# Altium PCB GR_Alim2026.PcbDoc
Units mm, origin at the board's own origin, x right, y up, seen from the top; angles counter-clockwise.
Board outline 82.04 x 84.45 mm, 2 copper layers (Top Layer, Bottom Layer); 62 components, 31 nets, 144 pads, 1 vias.
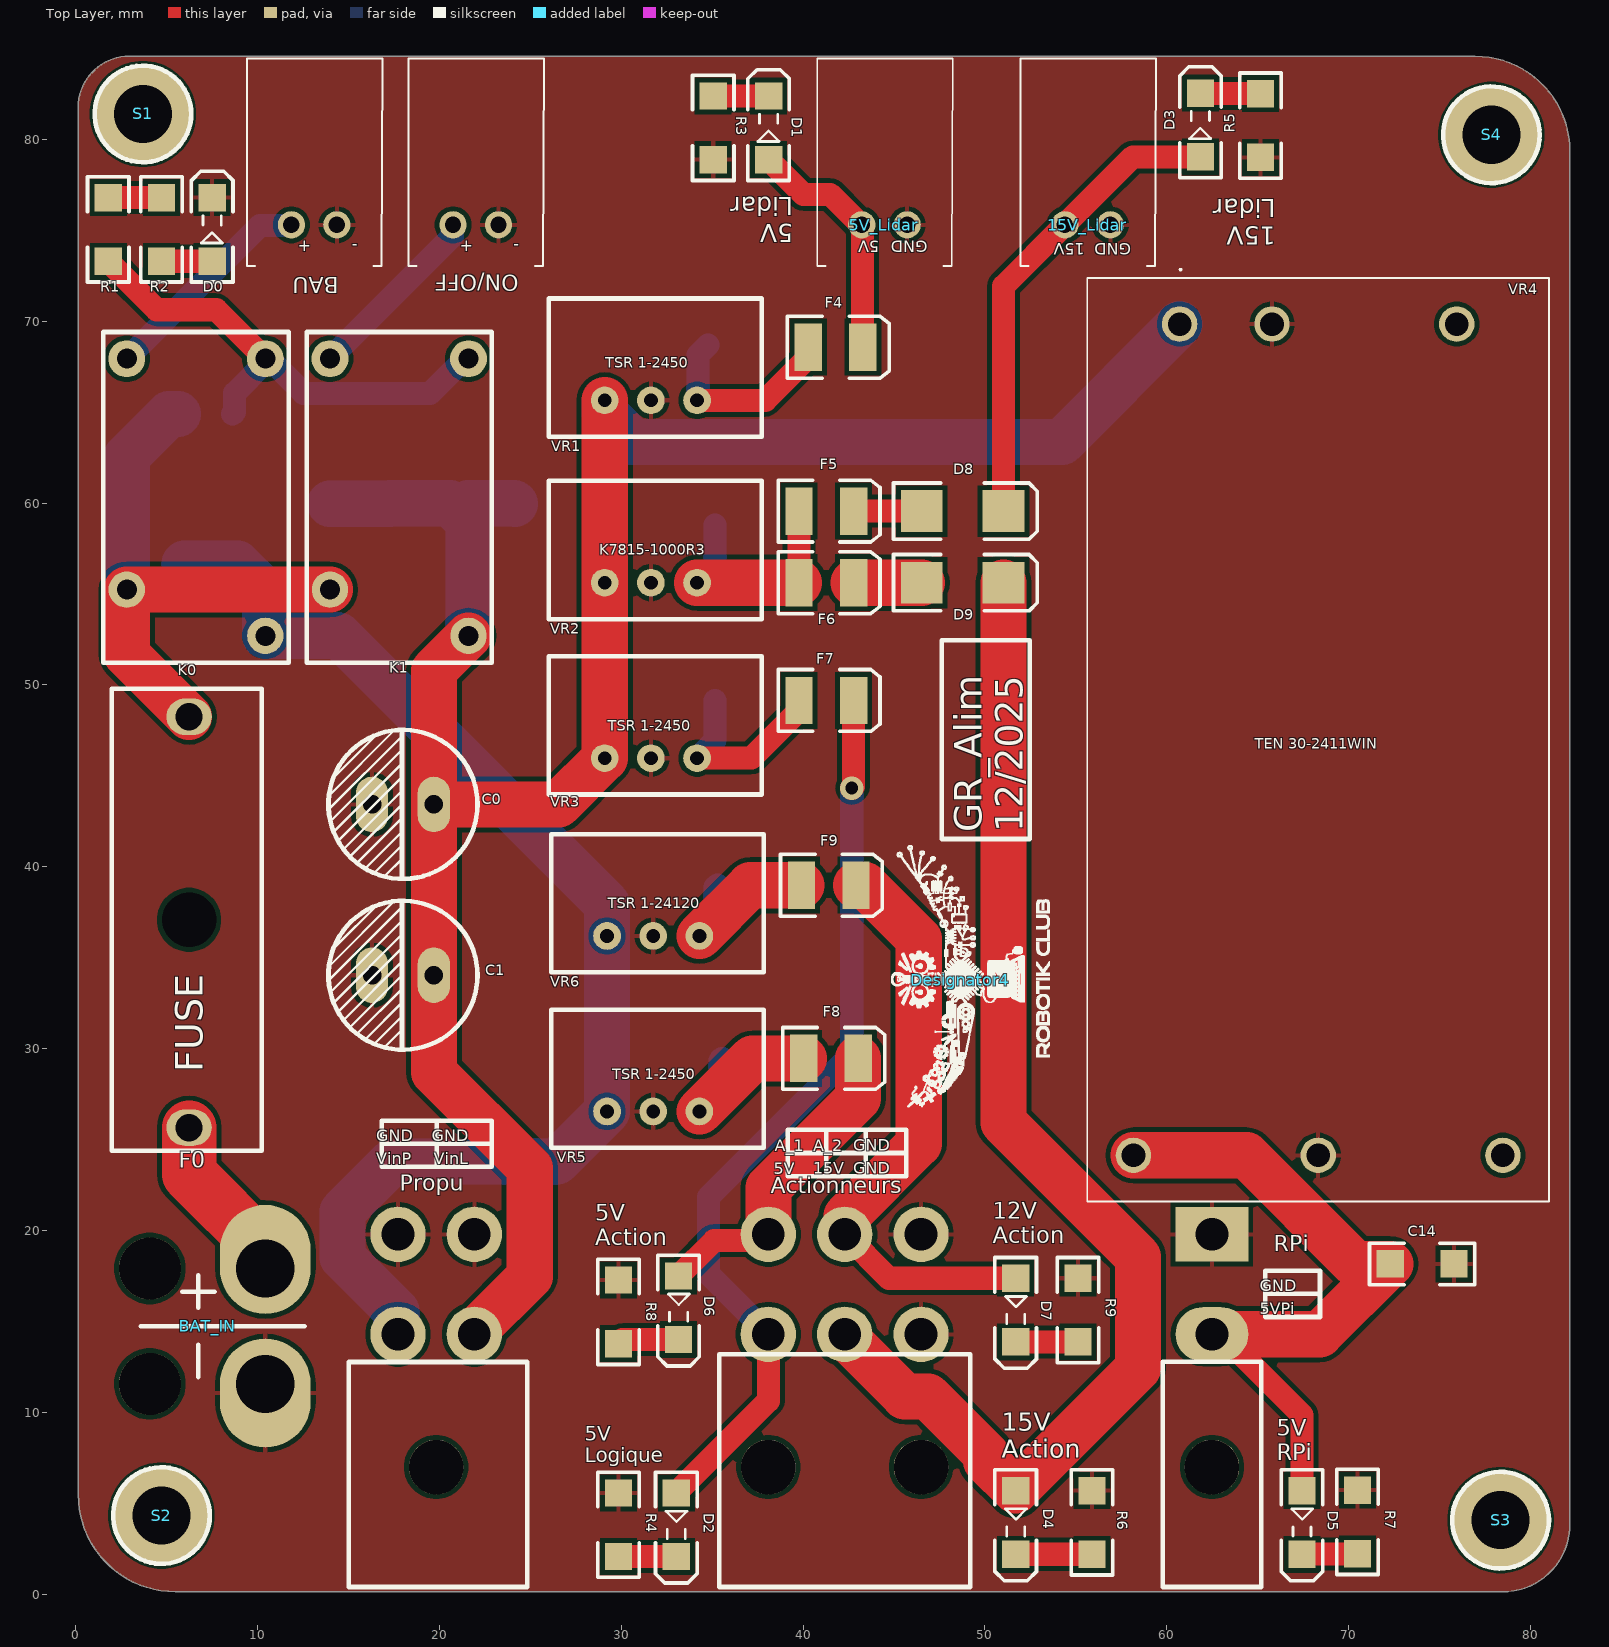
[diagram p0: Top Layer view]
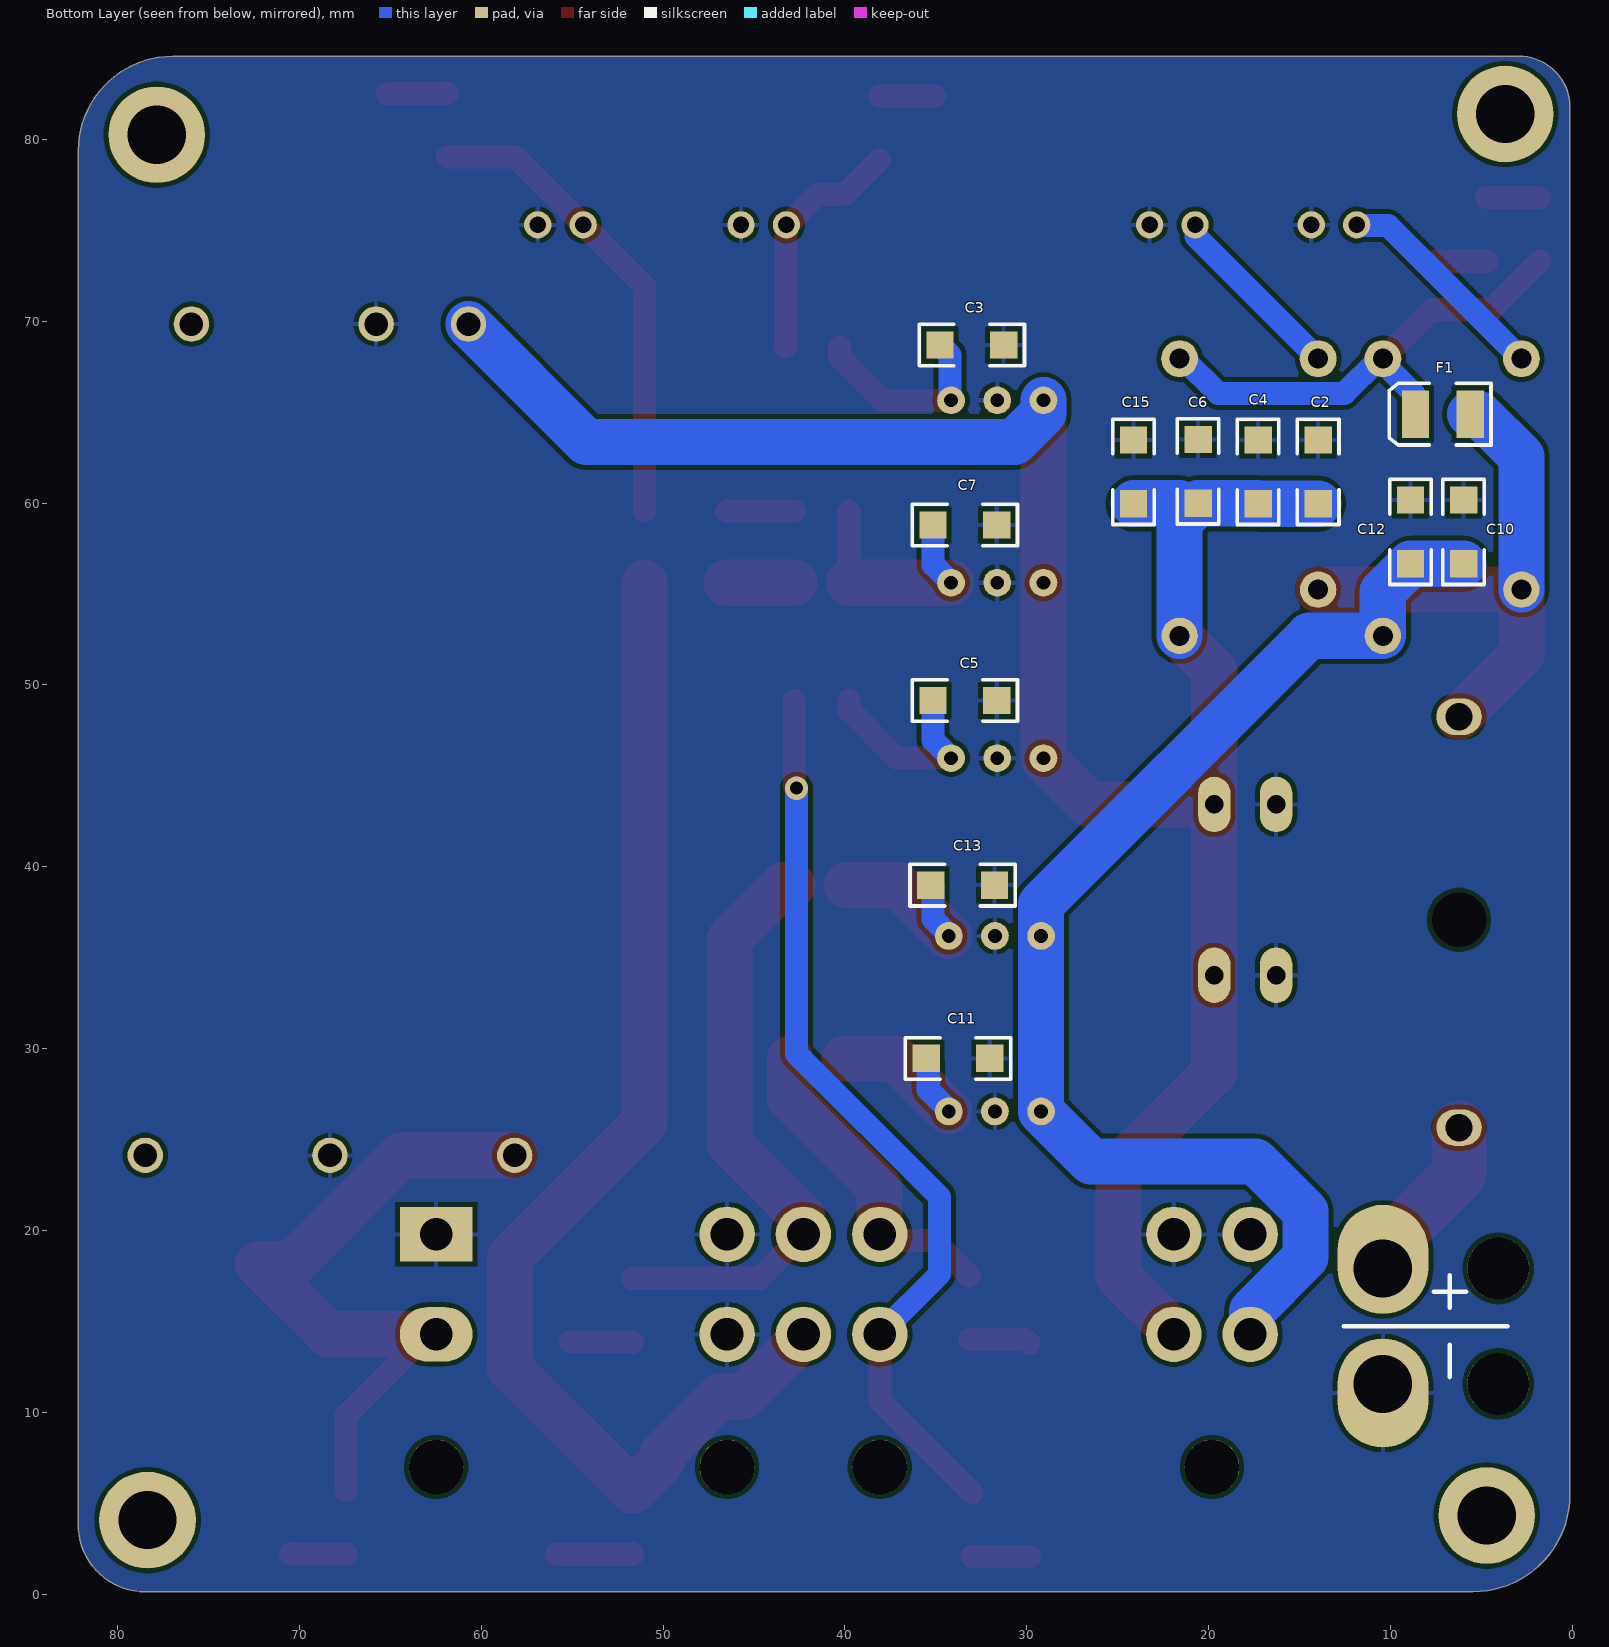
[diagram p1: Bottom Layer view, seen from below]

## Layer stack, top to bottom
Top Solder: solder mask 0.0102, Solder Resist, Dk 3.5
Top Layer: signal copper 0.0356
Dielectric 1: dielectric 0.32, FR-4, Dk 4.8
Bottom Layer: signal copper 0.0356
Bottom Solder: solder mask 0.0102, Solder Resist, Dk 3.5

## Board outline
0.128,5.461 0.128,81.788 cw(c2.922,81.788) 2.922,84.582 76.963,84.582 cw(c76.963,79.375) 82.17,79.375 82.17,3.81 cw(c78.487,3.81) 78.487,0.127 5.462,0.127 cw(c5.462,5.461)

## Design rules (kind name [scope] priority, off if disabled: settings)
Clearance [All] p1: gap=0.254 ignorepadtopadclearanceinfootprint=FALSE
PolygonConnect [All] p1: connectstyle=Relief reliefconductorwidth=0.254 reliefentries=4 polygonreliefangle="90 Angle" airgapwidth=0.254
RoutingVias [All] p1: holewidth=0.711 width=1.27 viastyle="Through Hole" minholewidth=0.711 minwidth=1.27 maxholewidth=0.711 maxwidth=1.27
SolderMaskExpansion [All] p1: expansion=0.102 istentingtop=FALSE
SupplyNets "Schematic Supply Nets_11" [InNet('15V_S')] p1: voltage=0.000
SupplyNets "Schematic Supply Nets_10" [InNet('15V_Lid')] p2: voltage=0.000
SupplyNets "Schematic Supply Nets_9" [InNet('Vin_P')] p3: voltage=0.000
SupplyNets "Schematic Supply Nets_8" [InNet('V_Rel')] p4: voltage=0.000
SupplyNets "Schematic Supply Nets_7" [InNet('Vin_L')] p5: voltage=0.000
SupplyNets "Schematic Supply Nets_6" [InNet('5V_Pi')] p6: voltage=0.000
SupplyNets "Schematic Supply Nets_5" [InNet('A2_12V')] p7: voltage=0.000
SupplyNets "Schematic Supply Nets_4" [InNet('V_Bat')] p8: voltage=0.000
SupplyNets "Schematic Supply Nets_3" [InNet('5V_L')] p9: voltage=0.000
SupplyNets "Schematic Supply Nets_2" [InNet('A1_5V')] p10: voltage=0.000
SupplyNets "Schematic Supply Nets_1" [InNet('GND')] p11: voltage=0.000
SupplyNets "Schematic Supply Nets" [InNet('5V_Lid')] p12: voltage=0.000
Width [InNetClass('Power')] p1: maxlimit=2.54 minlimit=0.254 preferedwidth=1.5
30 further rules are at their usual default settings.

## Components (designator, comment, footprint, x,y, rotation, side; value= is the part's Value field where it differs from the comment)
5V_Lidar "Header 2H" S2B-XH-A 43.221,75.311 r0 top
15V_Lidar "Header 2H" S2B-XH-A 54.397,75.311 r0 top
Actionneurs "MinifitJr 3x2H" MOLEX_MINIFITJR_3X2 42.283,14.285 r0 top
BAT_IN "Battery Onboard Solder" "Battery SALE" 10.415,11.557 r90 top
BAU "S2B-XH-A" S2B-XH-A 11.852,75.311 r0 top
C0 "Cap2" Condensateur 19.686,43.434 r180 top value=100µF
C1 "Cap2" Condensateur 19.686,34.036 r180 top value=100µF
C2 "Cap" "Capacitor 1206" 13.971,61.722 r270 bottom value=10µF
C3 "(optional)" "Capacitor 1206" 33.021,68.707 r0 bottom value=10µF
C4 "Cap" "Capacitor 1206" 17.273,61.722 r270 bottom value=10µF
C5 "(optional)" "Capacitor 1206" 33.402,49.149 r0 bottom value=22µF
C6 "Cap" "Capacitor 1206" 20.575,61.75 r270 bottom value=10µF
C7 "(optional)" "Capacitor 1206" 33.402,58.801 r0 bottom value=10µF
C10 "Cap" "Capacitor 1206" 5.97,58.42 r270 bottom value=10µF
C11 "(optional)" "Capacitor 1206" 33.783,29.464 r0 bottom value=10µF
C12 "Cap" "Capacitor 1206" 8.891,58.42 r270 bottom value=10µF
C13 "(optional)" "Capacitor 1206" 33.529,38.989 r0 bottom value=22µF
C14 "Cap" "Capacitor 1206" 74.042,18.161 r0 top value="220 uF"
C15 "Cap" "Capacitor 1206" 24.131,61.722 r90 bottom value=47µF
D0 "V_Rel" KP-3216SEC 7.494,75.057 r90 top
D1 "5V_L" KP-3216SEC 38.101,80.645 r90 top
D2 "5V_Lid" KP-3216SEC 33.021,3.81 r270 top
D3 "A_2" KP-3216SEC 61.85,80.8 r90 top
D4 "5V_L" KP-3216SEC 51.69,3.937 r270 top
D5 "5V_L" KP-3216SEC 67.438,3.937 r270 top
D6 "A_1" KP-3216SEC 33.148,15.748 r270 top
D7 "A_2_12V" KP-3216SEC 51.69,15.621 r270 top
D8 "LGE SS12" SMB 48.769,59.563 r0 top
D9 "LGE SS12" SMB 48.769,55.626 r0 top
Designator4 "Comment" Logo_lowres 48.642,33.782 r90 top
F0 "15A max" Fuse 6.224,25.654 r90 top
F1 "100mA" 3.5X2.8X1.9 7.113,64.897 r0 bottom
F4 "500 mA" 3.5X2.8X1.9 41.784,68.58 r0 top
F5 "500mA" 3.5X2.8X1.9 41.276,59.563 r0 top
F6 "100mA" 3.5X2.8X1.9 41.276,55.626 r0 top
F7 "1 A" 3.5X2.8X1.9 41.276,49.149 r0 top
F8 "Fuse 2" 3.5X2.8X1.9 41.53,29.464 r0 top
F9 "Fuse 2" 3.5X2.8X1.9 41.403,38.989 r0 top
K0 "Relay-SPST" Relay 6.605,60.325 r0 top
K1 "Relay-SPST" Relay 17.781,60.325 r0 top
ON/OFF "S2B-XH-A" S2B-XH-A 20.742,75.311 r0 top
Propu "MinifitJr 2X2H" MOLEX_MINIFITJR_2X2H 21.913,14.285 r0 top
R1 "Res2" "Resistor 1206" 1.779,75.057 r90 top value=1K3
R2 "Res2" "Resistor 1206" 4.7,75.057 r270 top value=1K3
R3 "Res2" "Resistor 1206" 35.053,80.645 r90 top value=300
R4 "Res2" "Resistor 1206" 29.846,3.81 r270 top value=300
R5 "Res2" "Resistor 1206" 65.152,80.772 r270 top value=1K3
R6 "Res2" "Resistor 1206" 55.881,3.937 r90 top value=1K3
R7 "Res2" "Resistor 1206" 70.486,3.965 r90 top value=300
R8 "300" "Resistor 1206" 29.846,15.522 r90 top
R9 "1K3" "Resistor 1206" 55.119,15.621 r90 top
RPi "Header 2H" Molex_MiniFitJr_2x1H 62.485,14.285 r270 top
S1 "Screw M3" "Screw M3" 3.684,81.407 r0 top
S2 "Screw M3" "Screw M3" 4.7,4.318 r0 top
S3 "Screw M3" "Screw M3" 78.36,4.064 r0 top
S4 "Screw M3" "Screw M3" 77.852,80.264 r0 top
VR1 "TSR 1-2450" TRS 29.084,65.659 r180 top
VR2 "K7815-1000R3" TRS 29.084,55.626 r180 top
VR3 "TSR 1-2450" TRS 29.084,45.974 r180 top
VR4 "TEN 30-2411WIN" TEN302411WIN 60.707,69.85 r180 top
VR5 "TSR 1-2450" TRS 29.211,26.543 r180 top
VR6 "TSR 1-24120" TRS 29.211,36.195 r180 top

## Footprints (in the part's own frame and the unit in brackets; to place one, negate y for a bottom-side part, rotate by r counter-clockwise, add the part's x,y. Pads: shape width x height; smd on the part's side, far side on the other; paste and mask are expansions set on the pad)
3.5X2.8X1.9 [mm] "SM LED; 2 C-Bend Leads; Body 3.5 x 2.8 x 1.9 mm, inc leads (LxWxH typ)"
  rect 1.5x2.6 smd: 1(-1.5,0) 2(1.5,0)
  silkscreen extent -2.65,-1.7 2.95,1.7
"Battery SALE" [mm] "Connecteur Batterie"
  round 3.4 hole 3.4: 0(0,6.35) 0(6.35,6.35)
  oval 6x5 hole 3.2 copper offset -0.5,0: 1(0,0)
  oval 6x5 hole 3.2 copper offset 0.5,0: 2(6.35,0)
  silkscreen extent 0.38,-2.16 5.97,6.86
"Capacitor 1206" [mm]
  rect 1.5x1.5 smd: 1(-1.75,0) 2(1.75,0)
  silkscreen extent -2.89,-1.14 2.89,1.14, body extent -1.97,-0.99 1.97,0.96, height 1.3
Condensateur [mil]
  oval 70x120 hole 40: 1(0,0) 2(133.86,0)
  silkscreen extent -94,-161 228,161, body extent -93,-160 227,160, height 500
Fuse [mm] "Porte-fusible monté sur circuit 10 (UL) A, 6.3 (VDE) A, fusible Cartouche, 893-0574"
  round 2 hole 3: 0(11.43,0)
  oval 2x2.5 hole 1.5: 1(0,0) 2(22.6,0)
  silkscreen extent -1.27,-4 24.13,4.25, body extent -1.27,-4.29 24.13,4.29, height 11.41
KP-3216SEC [mm]
  rect 1.5x1.5 smd: 1(-1.75,0) 2(1.75,0)
  silkscreen extent -2.89,-1.14 3.2,1.14, body extent -1.7,-0.79 1.5,0.81, height 1.1
Logo_lowres [mm]
  silkscreen extent -7.01,-4.93 7.39,3.76
Molex_MiniFitJr_2x1H [mm] "Connecteur Molex 2"
  rect 3x4 hole 1.8: 1(-5.5,0)
  oval 3x4 hole 1.8: 2(0,0)
  round 3 hole 3 unplated: 3(7.3,0)
  silkscreen extent 1.5,-2.7 13.9,2.7, body extent -6.03,-2.7 13.9,3.1, height 11.01
MOLEX_MINIFITJR_2X2H [mm] "MOLEX_MINIFITJR_3X2, 39-30-1060"
  round 3.048 hole 1.8: 1(-4.2,5.5) 2(-4.2,0) 3(0,5.5) 4(0,0)
  round 3 hole 3 unplated: 10(-2.1,-7.3)
  silkscreen extent -6.9,-13.9 2.9,-1.52, body extent -6.88,-13.9 3.12,6.03, height 11.4
MOLEX_MINIFITJR_3X2 [mm] "MOLEX_MINIFITJR_3X2, 39-30-1060"
  round 3.048 hole 1.8: 1(-4.2,5.5) 2(-4.2,0) 3(0,5.5) 4(0,0) 5(4.2,5.5) 6(4.2,0)
  round 3 hole 3 unplated: 10(-4.2,-7.3) 11(4.2,-7.3)
  silkscreen extent -6.9,-13.9 6.9,-1.1, body extent -6.9,-13.9 7.3,6.04, height 11.41
Relay [mm] "SPST-NO Relay"
  round 2 hole 1.1: 1(3.81,-7.62) 2(-3.81,-5.08)
  round 2.032 hole 1.1: 3(-3.81,7.62) 4(3.81,7.62)
  silkscreen extent -5.09,-9.09 5.09,9.09, body extent -5.08,-9.14 5.08,9.14, height 15
"Resistor 1206" [mm]
  rect 1.5x1.5 smd: 1(-1.75,0) 2(1.75,0)
  silkscreen extent -2.89,-1.14 2.89,1.14, body extent -1.98,-0.95 1.98,0.93, height 0.55
S2B-XH-A [mm]
  round 1.5 hole 0.9: 1(0,0) 2(2.5,0)
  silkscreen extent -2.45,-2.26 5,9.14, body extent -2.41,-2.32 4.99,9.18, height 6.15
"Screw M3" [mm] "M3 iso Screw"
  round 5.32 hole 3.2 unplated: 0(0,0)
  silkscreen extent -2.66,-2.66 2.66,2.66
SMB [mm] "DO-214-AA/SMB; 2 C-Bend Leads; Body 5.3 x 3.6 mm, inc. leads (LxW)"
  rect 2.3x2.3 smd: 1(-2.25,0) 2(2.25,0)
  silkscreen extent -3.8,-1.55 4.1,1.55
TEN302411WIN [mm]
  round 1.95 hole 1.3: 1(0,0) 2(-5.08,0) 3(-15.24,0) 4(2.54,45.72) 5(-7.62,45.72) 6(-17.78,45.72)
  silkscreen extent -20.32,-3.05 5.08,48.26, body extent -20.32,-2.79 5.08,48.01, height 11.03
TRS [mil]
  round 60 hole 30: 1(0,0) 2(-100,0) 3(-200,0)
  silkscreen extent -340,-220 121,79, body extent -341,-218 120,80, height 398

## Part data
5V_Lidar 15V_Lidar RPi: "Header, 2-Pin, Right Angle", LatestRevisionDate=17-Jul-2002, LatestRevisionNote="Re-released for DXP Platform.", Publisher="Altium Limited"
Actionneurs: library part "Header 3X2H", "Header, 3-Pin, Dual row, Right Angle", LatestRevisionDate=17-Jul-2002, LatestRevisionNote="Re-released for DXP Platform.", Publisher="Altium Limited"
BAT_IN: library part "Header 2", "Header, 2-Pin / Battery Onboard Solder / 24V", LatestRevisionDate=17-Jul-2002, LatestRevisionNote="Re-released for DXP Platform.", Publisher="Altium Limited"
BAU ON/OFF: library part S2B-XH-A-1_LF__SN_, "Connector", Arrow Part Number=S2B-XH-A-1(LF)(SN), Manufacturer_Name="JST (JAPAN SOLDERLESS TERMINALS)", Datasheet Link=http://www.jst-mfg.com/product/pdf/eng/eXH.pdf, Height=6.1mm, Manufacturer_Part_Number=S2B-XH-A-1(LF)(SN)
C0 C1 C2 C4 C6 C10 C12 C14 C15: "Capacitor", Publisher="Altium Limited"
  C0 C1: PackageDescription="Capacitor; 2 Leads", PackageReference=CAPR5-4X5, Published=23-Sep-2002
  C2 C4 C6 C10 C12 C14 C15: LatestRevisionDate=17-Jul-2002, LatestRevisionNote="Re-released for DXP Platform.", PackageDescription="Radial Cap, Thru-Hole; 2 Leads; 0.3 in Pin Spacing", PackageReference=RAD-0.3, Published=8-Jun-2000
C3 C5 C7 C11 C13: library part Cap, "Capacitor", LatestRevisionDate=17-Jul-2002, LatestRevisionNote="Re-released for DXP Platform.", PackageDescription="Radial Cap, Thru-Hole; 2 Leads; 0.3 in Pin Spacing", PackageReference=RAD-0.3, Published=8-Jun-2000, Publisher="Altium Limited"
D0 D1 D2 D3 D4 D5 D6 D7: library part LED2, "Typical RED, GREEN, YELLOW, AMBER GaAs LED", LatestRevisionDate=17-Jul-2002, LatestRevisionNote="Re-released for DXP Platform.", PackageDescription="SM LED; 2 Flat Leads", PackageReference=3.2X1.6X1.1, PackageVersion=Feb-2002, Published=8-Jun-2000, Publisher="Altium Limited"
D8 D9: library part Diode, "Default Diode", Code_JEDEC=DO-214-AB, LatestRevisionDate=17-Jul-2002, LatestRevisionNote="Re-released for DXP Platform.", PackageDescription="DO-214-AB/SMC; 2 C-Bend Leads; Body 7.9 x 5.9 mm, inc. leads (LxW)", PackageReference=SMC, PackageVersion=Sep-1996, Published=8-Jun-2000, Publisher="Altium Limited"
F0: library part "Fuse 2", "Main Fuse", LatestRevisionDate=17-Jul-2002, LatestRevisionNote="Re-released for DXP Platform.", PackageDescription="Thru-Hole; 2 Leads", PackageReference=PIN-W2/E2.8, Published=8-Jun-2000, Publisher="Altium Limited"
F1: library part "Fuse 2", "Resettable fuse T0", LatestRevisionDate=17-Jul-2002, LatestRevisionNote="Re-released for DXP Platform.", PackageDescription="Thru-Hole; 2 Leads", PackageReference=PIN-W2/E2.8, Published=8-Jun-2000, Publisher="Altium Limited"
F4 F5: library part "Fuse 2", "Resettable Fuse αA / JF", LatestRevisionDate=17-Jul-2002, LatestRevisionNote="Re-released for DXP Platform.", PackageDescription="Thru-Hole; 2 Leads", PackageReference=PIN-W2/E2.8, Published=8-Jun-2000, Publisher="Altium Limited"
F6: library part "Fuse 2", "Resettable Fuse T0", LatestRevisionDate=17-Jul-2002, LatestRevisionNote="Re-released for DXP Platform.", PackageDescription="Thru-Hole; 2 Leads", PackageReference=PIN-W2/E2.8, Published=8-Jun-2000, Publisher="Altium Limited"
F7: library part "Fuse 2", "Resettable fuse JG / BF", LatestRevisionDate=17-Jul-2002, LatestRevisionNote="Re-released for DXP Platform.", PackageDescription="Thru-Hole; 2 Leads", PackageReference=PIN-W2/E2.8, Published=8-Jun-2000, Publisher="Altium Limited"
F8 F9: "Résistance 0Ω", LatestRevisionDate=17-Jul-2002, LatestRevisionNote="Re-released for DXP Platform.", PackageDescription="Thru-Hole; 2 Leads", PackageReference=PIN-W2/E2.8, Published=8-Jun-2000, Publisher="Altium Limited"
K0 K1: "Single-Pole Single-Throw Relay", LatestRevisionDate=17-Jul-2002, LatestRevisionNote="Re-released for DXP Platform.", PackageReference=MODULE4, Published=24-Mar-1999, Publisher="Altium Limited"
Propu: library part "Header 2X2H", "Header, 2-Pin, Dual row, Right Angle", LatestRevisionDate=17-Jul-2002, LatestRevisionNote="Re-released for DXP Platform.", Publisher="Altium Limited"
R1 R2 R3 R4 R5 R6 R7: "Resistor", LatestRevisionDate=17-Jul-2002, LatestRevisionNote="Re-released for DXP Platform.", PackageDescription="Axial Device, Thru-Hole; 2 Leads; 0.4 in Pin Spacing", PackageReference=AXIAL-0.4, Published=8-Jun-2000, Publisher="Altium Limited"
R8 R9: library part Res2, "Resistor", LatestRevisionDate=17-Jul-2002, LatestRevisionNote="Re-released for DXP Platform.", PackageDescription="Axial Device, Thru-Hole; 2 Leads; 0.4 in Pin Spacing", PackageReference=AXIAL-0.4, Published=8-Jun-2000, Publisher="Altium Limited"
VR1 VR2 VR3 VR5 VR6: library part "Volt Reg", "Voltage Regulator", LatestRevisionDate=29-May-2009, LatestRevisionNote="IPC-7351 Footprint Added.", PackageDescription="3-Pin Transistor Outline Package 2.54 mm Pitch, 15.1 mm Lead Span", PackageReference=D2PAK, Published=24-Mar-1999, Publisher="Altium Limited"
VR4: library part TEN_30-2411WIN, "Power Supply", Manufacturer_Name="Traco Power", Mouser Part Number=495-TEN-30-2411WIN, Datasheet Link=https://tracopower.com/ten30win-datasheet/, Height=10.7mm, Manufacturer_Part_Number="TEN 30-2411WIN", Mouser Price/Stock=https://www.mouser.co.uk/ProductDetail/TRACO-Power/TEN-30-2411WIN?qs=ckJk83FOD0WILf%252BNmub5Yg%3D%3D

## Via types
v1: diameter 1.27, hole 0.711, Top Layer to Bottom Layer, 1 vias

## Nets (pads, with @x,y where several pads share a name; then routed paths per layer and width w, separated by ;. In a path a pad name is that pad's centre, name@x,y a point inside that pad or via, vN(x,y) a via of type N, cw(c..) or ccw(c..) an arc to the next point about the centre after c; other vN are vias at no path point)
5V_L: Actionneurs.2 D2.1 F7.2 | length 50.4
  Top Layer w1.27: D2.1 38.083,10.622 Actionneurs.2 ; v1(42.673,44.323) 42.776,44.426 F7.2
  Bottom Layer w1.27: Actionneurs.2 38.083,14.308 34.799,17.592 34.799,21.844 42.673,29.718 v1(42.673,44.323)
5V_Lid: 5V_Lidar.1 D1.1 F4.2 | length 13.4
  Top Layer w1.27: D1.1 40.012,76.984 41.486,76.984 43.159,75.311 5V_Lidar.1 43.252,75.28 43.252,68.612 F4.2
5V_Pi: C14.1 D5.1 RPi.2 VR4.4 | length 39
  Top Layer w1.27: RPi.2 62.985,14.285 67.438,9.832 D5.1
  Top Layer w2.54: VR4.4 64.39,24.13 70.359,18.161 C14.1 68.416,14.285 RPi.2
15V_Lid: 15V_Lidar.1 D3.1 D8.2 | length 26.1
  Top Layer w1.27: D8.2 51.019,71.933 15V_Lidar.1 58.136,79.05 D3.1
15V_S: Actionneurs.4 D4.1 D9.2 | length 69
  Top Layer w2.54: Actionneurs.4 42.283,14.174 45.583,10.874 46.87,10.874 50.06,7.684 50.06,7.317 D4.1 58.421,12.418 58.421,18.542 51.019,25.944 D9.2
A1_5V: Actionneurs.1 D6.1 F8.2 | length 17.6
  Top Layer w1.27: D6.1 35.095,19.445 37.743,19.445 Actionneurs.1@38.101,19.803 ; F8.2@43.019,29.453 F8.2
  Top Layer w2.54: Actionneurs.1@38.101,19.803 38.101,22.352 43.019,27.27 F8.2@43.019,29.453
A2_12V: Actionneurs.3 D7.1 F9.2 | length 33
  Top Layer w1.27: Actionneurs.3 42.304,19.785 44.718,17.371 D7.1
  Top Layer w2.54: Actionneurs.3 42.38,19.882 42.38,20.789 46.356,24.765 46.356,36.026 43.393,38.989 F9.2
GND: 5V_Lidar.2 15V_Lidar.2 Actionneurs.5 Actionneurs.6 BAT_IN.1 BAU.2 C0.2 C1.2 C2.1 C3.1 C4.1 C5.1 C6.1 C7.1 C10.1 C11.1 C12.1 C13.1 C14.2 C15.2 D0.2 ON/OFF.2 Propu.1 Propu.3 R3.1 R4.1 R5.2 R6.2 R7.2 R8.2 R9.2 RPi.1 VR1.2 VR2.2 VR3.2 VR4.2 VR4.5 VR5.2 VR6.2
NetBAT_IN_2: BAT_IN.2 F0.1 | length 9.5
  Top Layer w1: BAT_IN.2 BAT_IN.2@10.415,18.907
  Top Layer w3: F0.1 6.224,23.098 BAT_IN.2@10.415,18.907
NetBAU_1: BAU.1 K0.3 | length 12.1
  Bottom Layer w1.27: K0.3 10.117,75.267 11.808,75.267 BAU.1
NetC3_2: C3.2 F4.1 VR1.3 | length 11
  Top Layer w1.27: VR1.3 37.913,65.659 40.284,68.03 F4.1
  Bottom Layer w1.27: VR1.3 34.212,65.708 34.212,68.149 C3.2
NetC5_2: C5.2 F7.1 VR3.3 | length 10.8
  Top Layer w1.27: VR3.3 37.151,45.974 39.776,48.599 F7.1
  Bottom Layer w1.27: VR3.3 35.152,46.962 C5.2
NetC7_2: C7.2 F5.1 F6.1 VR2.3 | length 13.1
  Top Layer w1.27: F6.1 F5.1
  Top Layer w2.54: VR2.3 F6.1
  Bottom Layer w1.27: VR2.3 35.152,56.614 C7.2
NetC11_2: C11.2 F8.1 VR5.3 | length 10.4
  Top Layer w2.54: VR5.3 37.212,29.464 F8.1
  Bottom Layer w1.27: VR5.3 34.291,26.612 35.418,27.739 35.418,29.349 C11.2
NetC13_2: C13.2 F9.1 VR6.3 | length 10
  Top Layer w2.54: VR6.3 37.085,38.989 F9.1
  Bottom Layer w1.27: VR6.3 34.291,36.264 35.164,37.137 35.164,38.874 C13.2
NetD0_1: D0.1 R2.2 | length 2.8
  Top Layer w1.27: R2.2 D0.1
NetD1_2: D1.2 R3.2 | length 3
  Top Layer w1.27: R3.2 D1.2
NetD2_2: D2.2 R4.2 | length 3.2
  Top Layer w1.27: R4.2 D2.2
NetD3_2: D3.2 R5.1 | length 3.3
  Top Layer w1.27: D3.2 61.864,82.536 65.138,82.536 R5.1
NetD4_2: D4.2 R6.1 | length 4.2
  Top Layer w1.27: D4.2 R6.1
NetD5_2: D5.2 R7.1 | length 3.1
  Top Layer w1.27: D5.2 67.452,2.201 70.472,2.201 R7.1
NetD6_2: D6.2 R8.1 | length 3.4
  Top Layer w1.27: R8.1 30.072,13.998 D6.2
NetD7_2: D7.2 R9.1 | length 3.4
  Top Layer w1.27: D7.2 R9.1
NetD8_1: D8.1 F5.2 | length 3.7
  Top Layer w1.27: F5.2 D8.1
NetD9_1: D9.1 F6.2 | length 3.7
  Top Layer w2.54: F6.2 D9.1
NetK1_3: K1.3 ON/OFF.1 | length 10.2
  Bottom Layer w1.27: K1.3 20.698,74.672 20.698,75.267 ON/OFF.1
NetR1_2: R1.2 R2.1 | length 2.9
  Top Layer w1.27: R1.2 R2.1
V_Bat: F0.2 F1.1 K0.2 K1.2 | length 30.7
  Top Layer w2.54: F0.2 2.795,51.683 K0.2 K1.2
  Bottom Layer w2.54: K0.2 2.795,62.569 5.123,64.897 F1.1
V_Rel: F1.2 K0.4 K1.4 R1.1 | length 27.4
  Top Layer w1.27: R1.1 4.444,70.641 7.718,70.641 K0.4
  Bottom Layer w1.27: F1.2 8.728,65.012 8.728,66.052 10.415,67.739 K0.4 10.621,67.945 12.526,66.04 19.48,66.04 21.385,67.945 K1.4
Vin_L: C0.1 C1.1 C2.2 C4.2 C6.2 C15.1 K1.1 Propu.4 VR1.1 VR2.1 VR3.1 VR4.1 | length 125.3
  Top Layer w2.54: K1.1 19.686,50.8 C0.1 ; Propu.4 21.913,14.422 24.961,17.47 24.961,23.427 19.686,28.702 C1.1 C0.1 ; VR1.1 VR2.1 VR3.1 26.544,43.434 C0.1
  Bottom Layer w2.54: C2.2 C4.2 17.301,60 C6.2 21.591,58.984 K1.1 ; 21.591,60 24.103,60 C15.1 ; VR1.1 29.084,64.966 30.677,63.373 54.23,63.373 VR4.1
Vin_P: C10.2 C12.2 K0.1 Propu.2 VR5.1 VR6.1 | length 68.7
  Bottom Layer w2.54: C10.2 C12.2 10.415,55.146 K0.1 14.462,52.705 29.211,37.956 VR6.1 VR5.1 26.463,23.795 17.413,23.795 14.665,21.048 14.665,18.522 17.616,15.572 17.616,14.382 Propu.2
pads on no net: Actionneurs.10 Actionneurs.11 BAT_IN.0 F0.0 Propu.10 RPi.3 S1.0 S2.0 S3.0 S4.0 VR4.3 VR4.6

## Polygon pours and split planes (outlines as drawn)
GND on Top Layer "GND_L01_P000" (solid, remove dead copper, pour order 0): 0.128,5.461 0.128,81.788 cw(c2.922,81.788) 2.922,84.582 76.963,84.582 cw(c76.963,79.375) 82.17,79.375 82.17,3.81 cw(c78.487,3.81) 78.487,0.127 5.462,0.127 cw(c5.462,5.461)
GND on Bottom Layer "GND_L02_P001" (solid, remove dead copper, pour order 1): 0.128,5.461 0.128,81.788 cw(c2.922,81.788) 2.922,84.582 76.963,84.582 cw(c76.963,79.375) 82.17,79.375 82.17,3.81 cw(c78.487,3.81) 78.487,0.127 5.462,0.127 cw(c5.462,5.461)

## Silkscreen, mask and mechanical layers (free items; w line width, h text height)
Top Overlay:
  lines w0.254: 16.816,24.765 22.861,24.765 ; 19.838,23.495 19.838,26.035 ; 39.142,24.257 45.518,24.257 ; 41.276,22.987 41.276,25.527 ; 43.435,22.987 43.435,25.527 ; 65.406,16.51 68.428,16.51 ; 16.816,23.495 22.861,23.495 22.861,26.035 16.816,26.035 16.816,23.495 ; 39.142,22.987 39.142,25.527 45.67,25.527 45.67,22.987 39.142,22.987 ; 47.626,41.529 52.452,41.529 52.452,52.451 47.626,52.451 47.626,41.529 ; 65.406,15.24 68.428,15.24 68.428,17.78 65.406,17.78 65.406,15.24
  text "5V / Lidar" at 39.441,76.835 h1 r180
  text "15V / Lidar" at 65.984,76.708 h1 r180
  text "+" at 12.955,74.422 h0.64 r180
  text "-" at 15.495,74.422 h0.64 r180
  text "+" at 21.845,74.422 h0.64 r180
  text "-" at 24.385,74.422 h0.64 r180
  text "5V" at 44.197,74.422 h0.64 r180
  text "GND" at 46.864,74.422 h0.64 r180
  text "15V" at 55.5,74.295 h0.64 r180
  text "GND" at 58.04,74.295 h0.64 r180
  text "GR_Alim / 12/2025" at 52.071,41.91 h1.5 r90
  text "GND" at 16.511,24.917 h0.64
  text "GND" at 19.559,24.917 h0.64
  text "GND" at 42.749,24.384 h0.64
  text "A_1" at 38.431,24.359 h0.64
  text "A_2" at 40.565,24.359 h0.64
  text "VinP" at 16.511,23.647 h0.64
  text "VinL" at 19.686,23.647 h0.64
  text "15V" at 40.565,23.114 h0.64
  text "GND" at 42.749,23.114 h0.64
  text "5V" at 38.38,23.089 h0.64
  text "12V / Action" at 50.421,19.304 h0.9
  text "5V / Action" at 28.577,19.177 h0.9
  text "GND" at 65.101,16.662 h0.64
  text "5VPi" at 65.101,15.392 h0.64
  text "15V / Action" at 50.928,7.493 h1
  text "5V / RPi" at 66.042,7.366 h0.9
  text "5V / Logique" at 27.994,7.239 h0.8
Mechanical 1:
  lines w0.254: 0.128,5.334 ccw(c5.335,5.334) 5.335,0.127 78.741,0.127 ccw(c78.55,3.746) 82.17,3.937 82.17,79.756 ccw(c77.344,79.756) 77.344,84.582 2.668,84.582 ccw(c2.731,81.978) 0.128,81.915 0.128,5.334

## Text inside footprints (layer, text, board x,y; h text height)
F0: Top Overlay "FUSE" at 6.986,28.702 h1.52 r90